# Altium PCB PCB1.PcbDoc
Units mm, origin at the board's own origin, x right, y up, seen from the top; angles counter-clockwise.
Board outline 90.12 x 93.93 mm, 2 copper layers (Top Layer, Bottom Layer), stack 1.536 mm thick; 20 components, 12 nets, 103 pads, 481 vias.
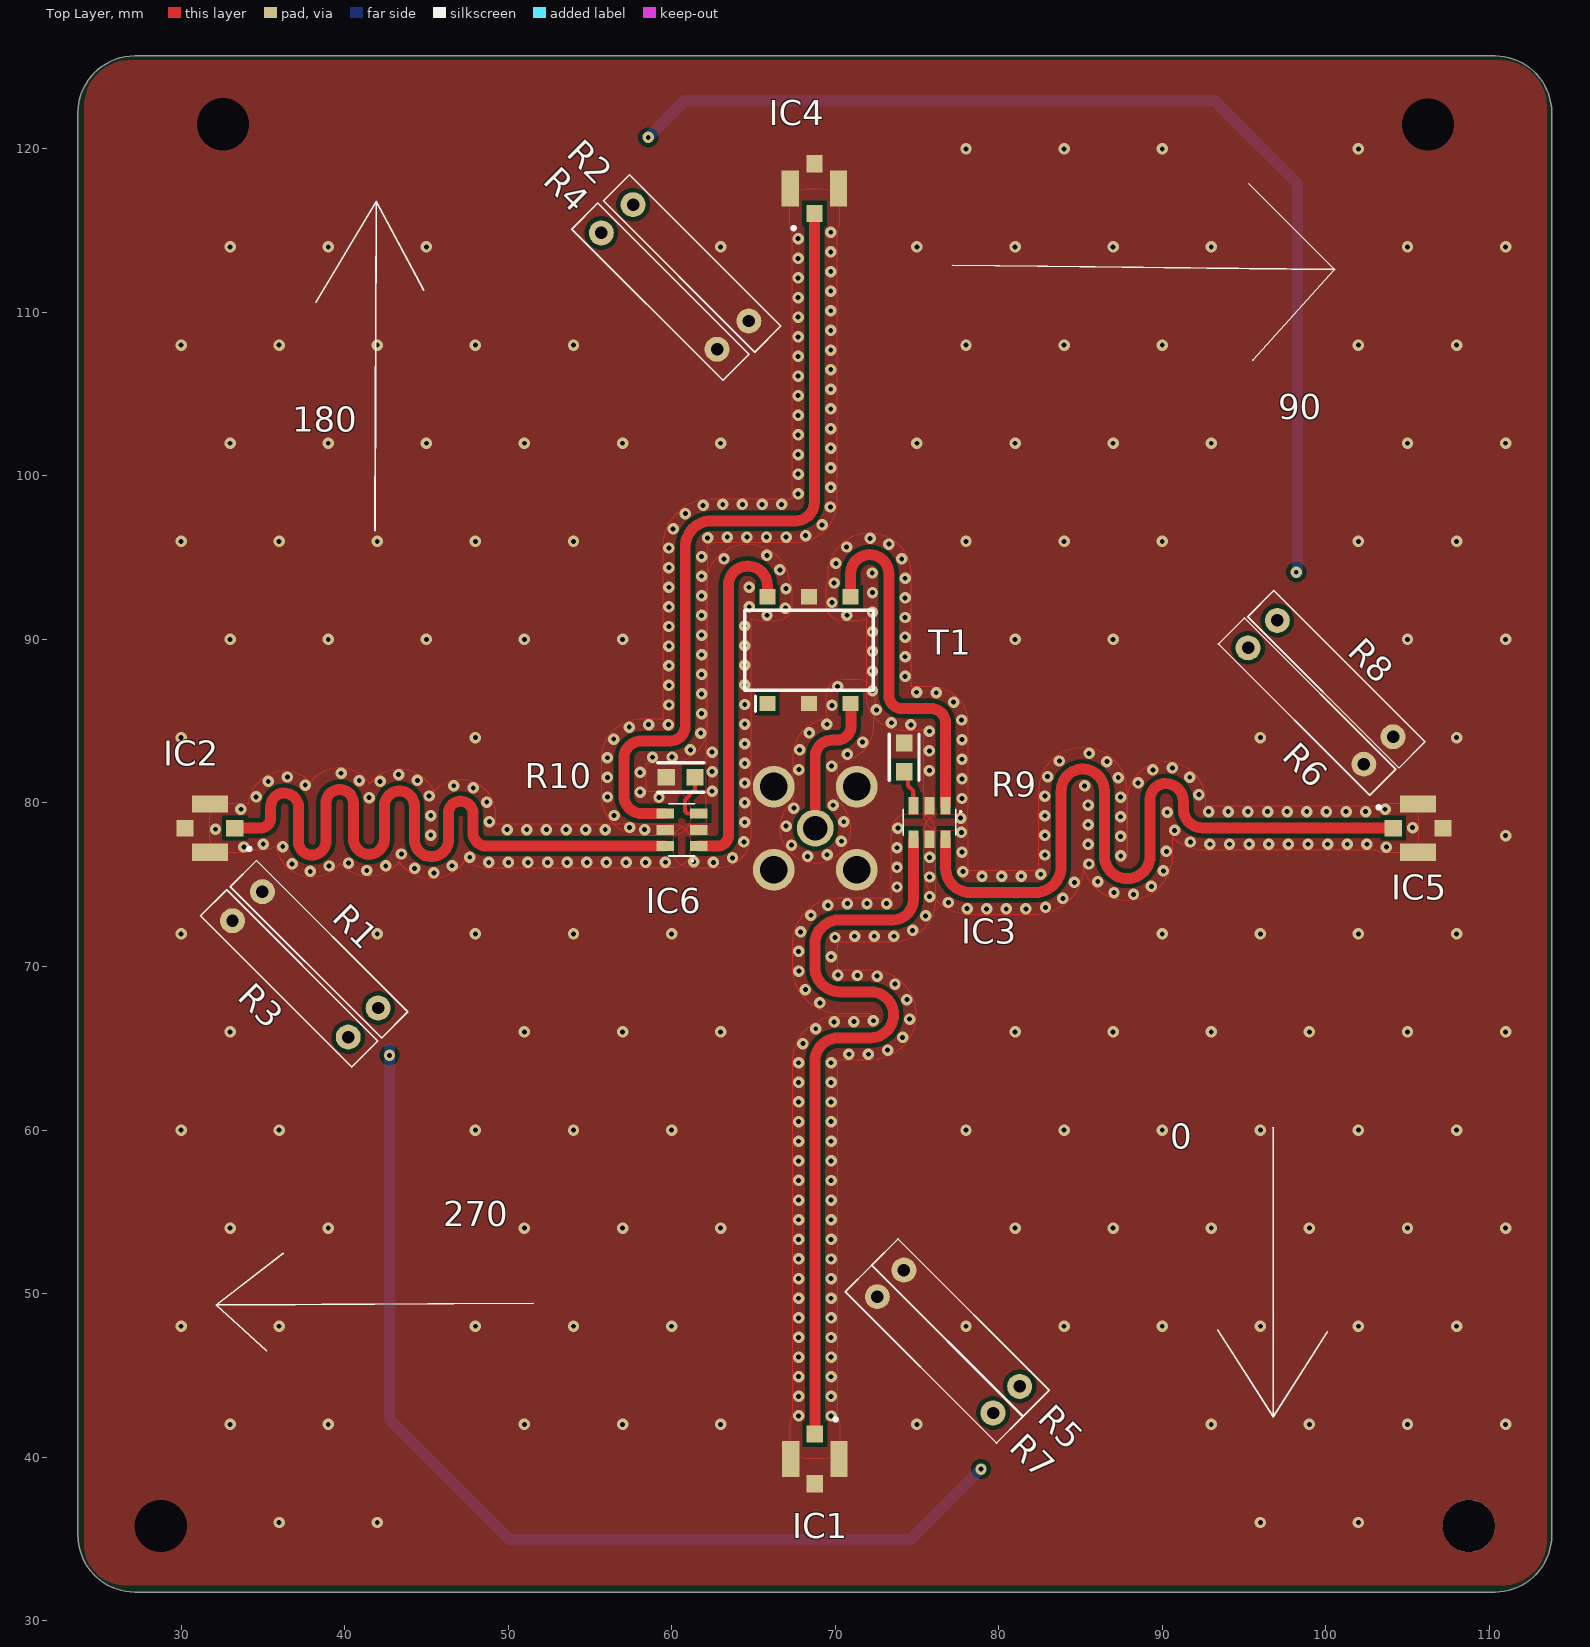
[diagram p0: Top Layer view]
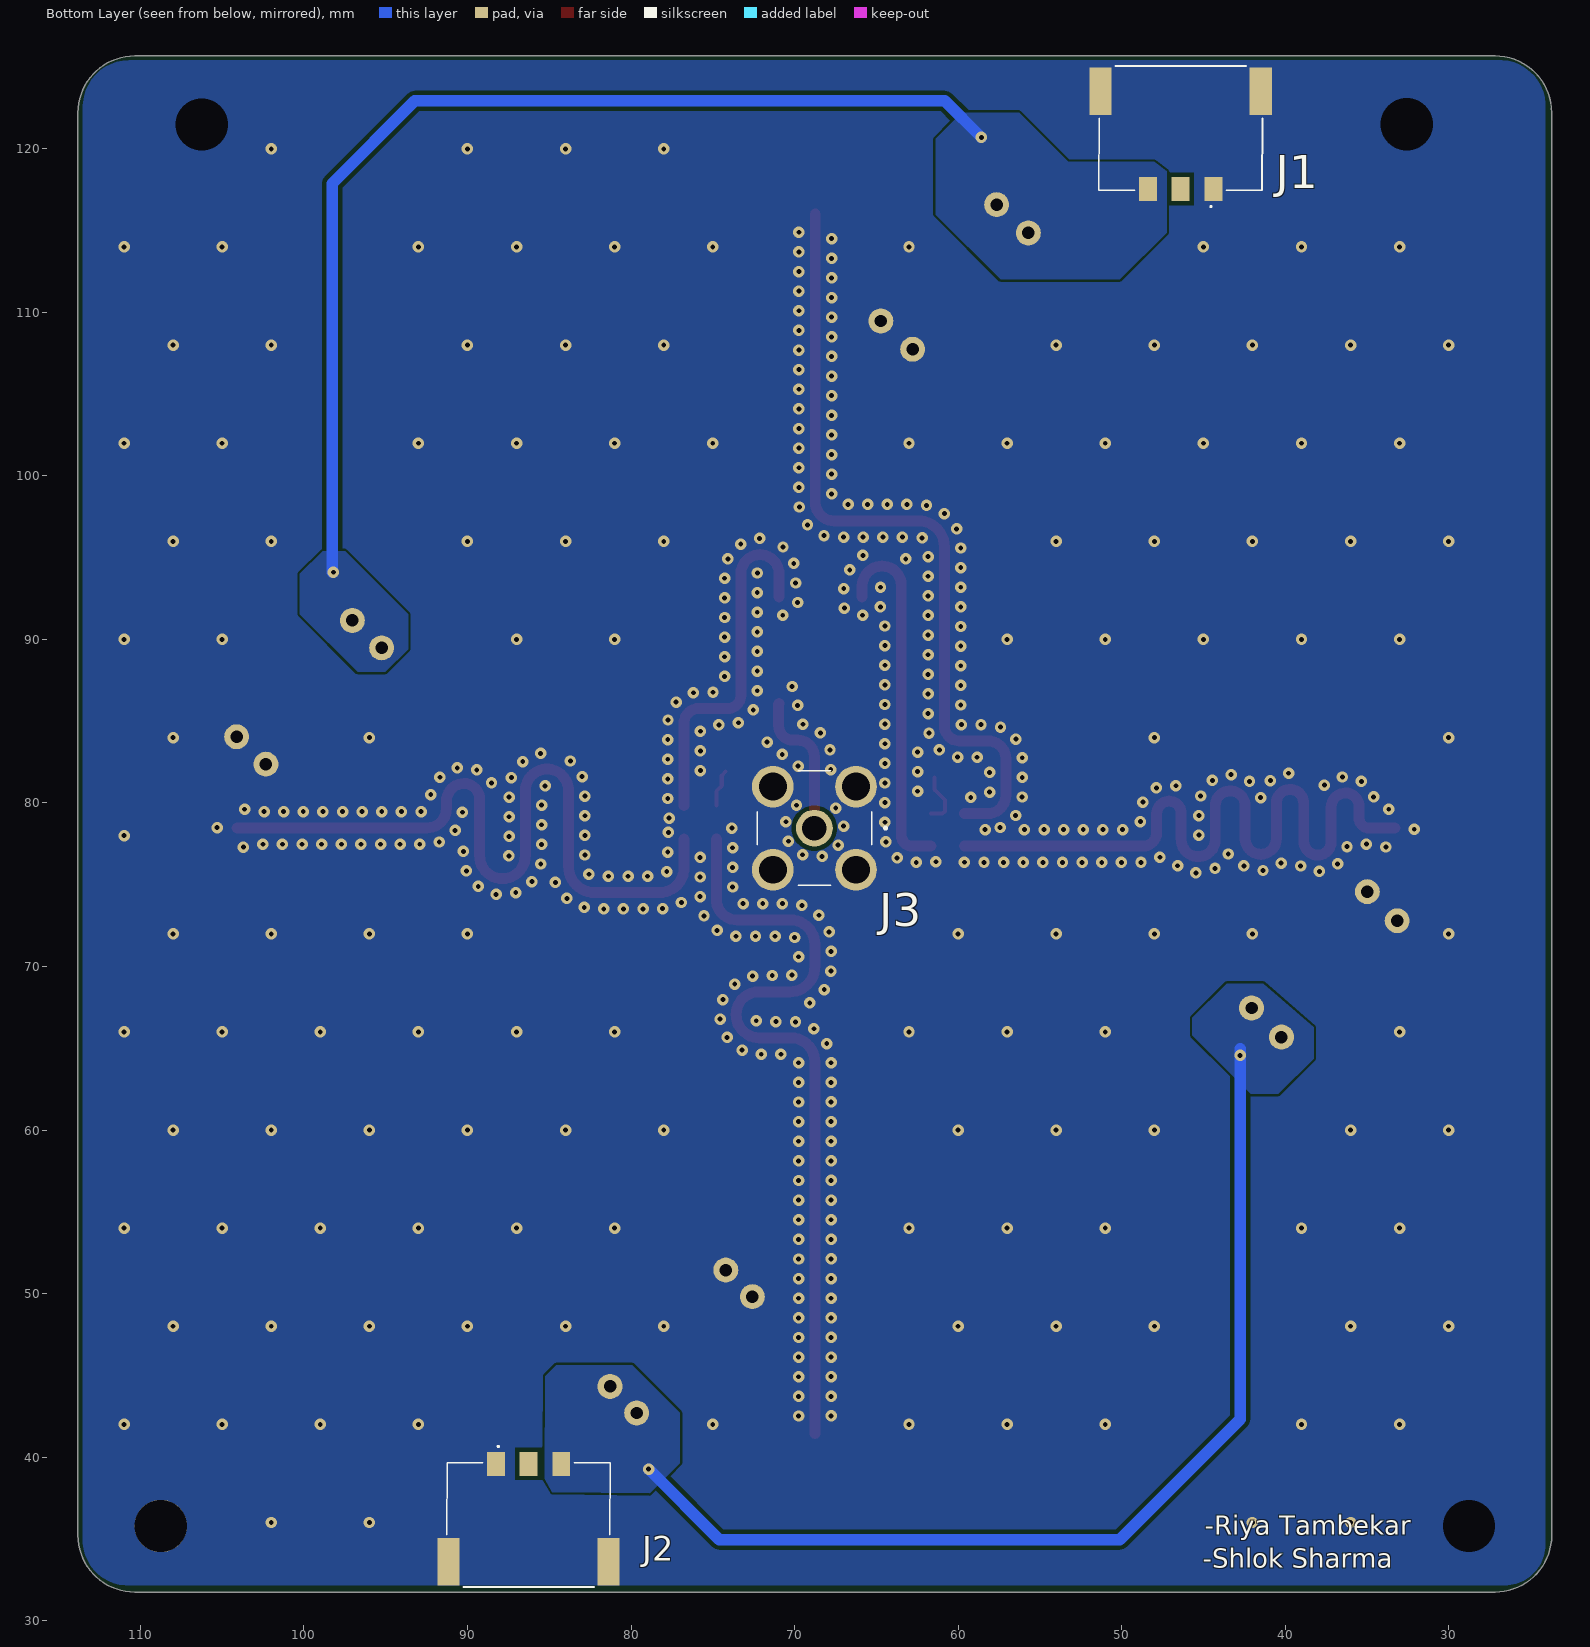
[diagram p1: Bottom Layer view, seen from below]
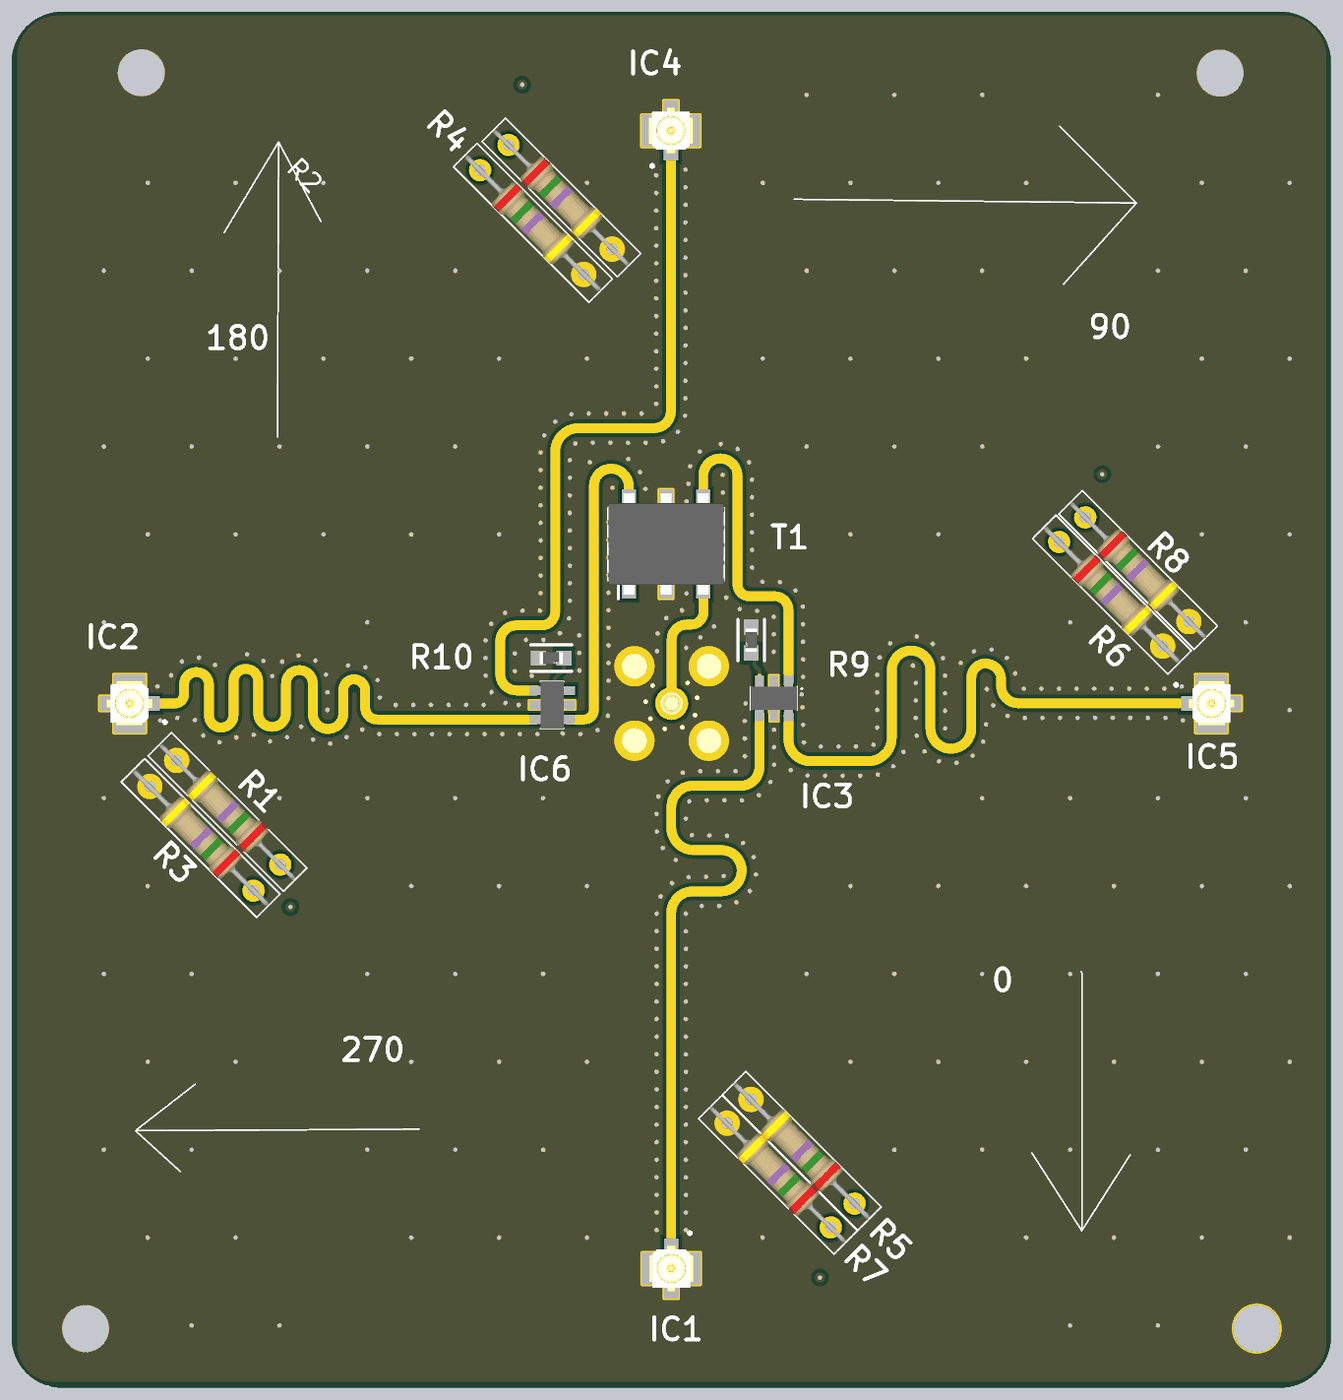
[diagram p2: 3D render of the assembled board from above, using the file's embedded part models]
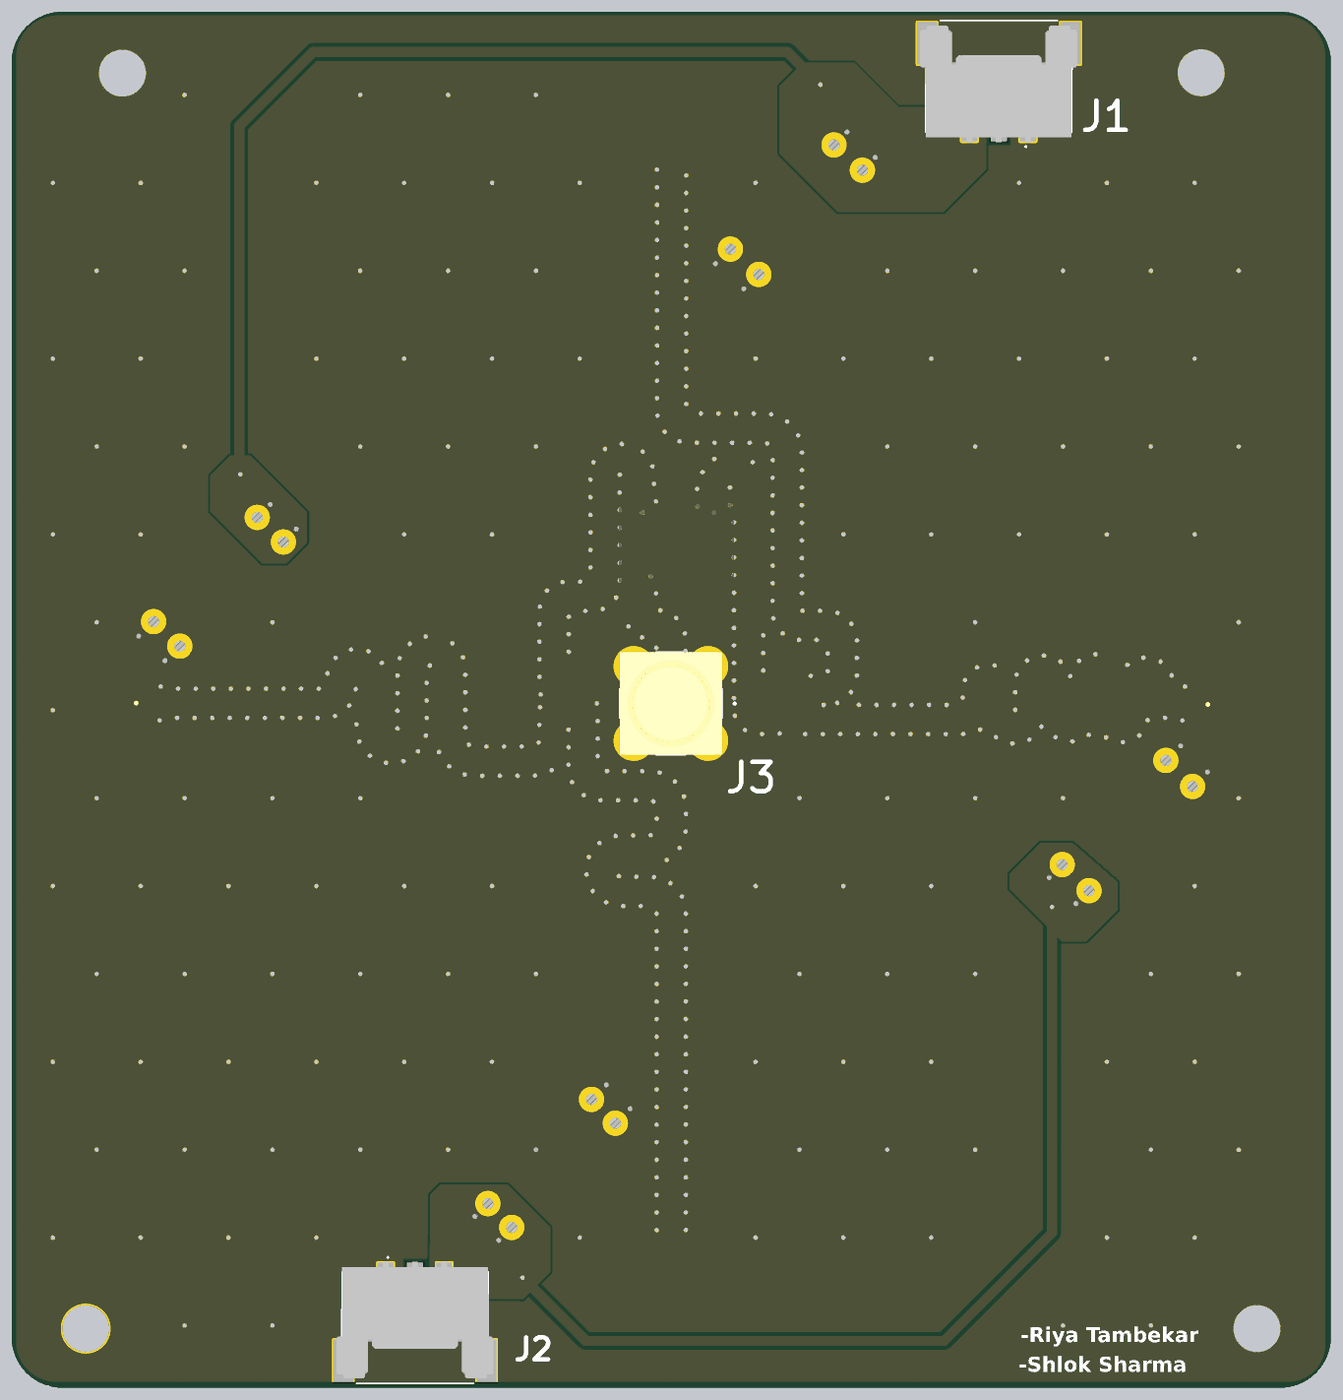
[diagram p3: 3D render of the assembled board from below, using the file's embedded part models]

## Layer stack, top to bottom
Top Solder: solder mask 0.0195, Solder Resist, Dk 3.5
Top Layer: signal copper 0.018
Dielectric 1: dielectric 1.5, FR-4, Dk 4.5
Bottom Layer: signal copper 0.018
Bottom Solder: solder mask 0.0195, Solder Resist, Dk 3.5

## Board outline
27.167,31.75 cw(c27.167,35.219) 23.698,35.219 23.698,122.21 cw(c27.167,122.21) 27.167,125.679 110.349,125.679 cw(c110.349,122.211) 113.817,122.211 113.817,35.219 cw(c110.349,35.219) 110.349,31.75

## Design rules (kind name [scope] priority, off if disabled: settings)
BoardOutlineClearance [All] p1: gap=0.254 ignorepadtopadclearanceinfootprint=FALSE except(-1: Poly-OutlineEdge; 0: Arc-SplitContinuation Track-SplitContinuation SMDPad-SplitContinuation THPad-SplitContinuation Via-SplitContinuation Fill-SplitContinuation Poly-SplitContinuation Region-SplitContinuation Text-SplitContinuation)
Clearance [All] p1: gap=0.254 ignorepadtopadclearanceinfootprint=FALSE except(0.127: Arc-Via Track-Via SMDPad-Via THPad-Via Via-Via Fill-Fill Fill-Poly Fill-Region Poly-Poly Poly-Region Region-Region)
MatchedLengths [InNetClass('All Nets')] p1: tolerance=0.254 checknetsindiffpair=FALSE checkdiffpairvsdiffpair=TRUE checkxsignals=TRUE checkothers=TRUE
PolygonConnect [All] p1: connectstyle=Direct reliefconductorwidth=0.254 reliefentries=4 polygonreliefangle="90 Angle" airgapwidth=0.254
RoutingVias [All] p1: holewidth=0.3 width=0.7 viastyle="Through Hole" minholewidth=0.2 minwidth=0.5 maxholewidth=0.711 maxwidth=1.27
SolderMaskExpansion [All] p1: expansion=0.102 istentingtop=FALSE
SupplyNets "Schematic Supply Nets_3" [InNet('5vb')] p1: voltage=0.000
SupplyNets "Schematic Supply Nets_2" [InNet('5va')] p2: voltage=0.000
SupplyNets "Schematic Supply Nets" [InNet('GND')] p3: voltage=0.000
Width [All] p1: maxlimit=1 minlimit=0.127 preferedwidth=0.7 toplayer_minwidth=0.254 toplayer_prefwidth=0.678 minimp=50.000000 maximp=50.000000 favimp=50.000000
30 further rules are at their usual default settings.

## Components (designator, comment, footprint, x,y, rotation, side; value= is the part's Value field where it differs from the comment)
IC1 "CONMHF1-SMD-G-T" CONMHF1SMDGT 68.758,39.891 r0 top
IC2 "CONMHF1-SMD-G-T" CONMHF1SMDGT 31.762,78.461 r270 top
IC3 "QCN-5D+" QCN5D 75.768,78.816 r180 top
IC4 "CONMHF1-SMD-G-T" CONMHF1SMDGT 68.732,117.565 r180 top
IC5 "CONMHF1-SMD-G-T" CONMHF1SMDGT 105.652,78.461 r90 top
IC6 "QCN-5D+" QCN5D 60.621,78.359 r90 top
J1 "205338-0003" 2053380003 42.388,117.47 r180 bottom
J2 "205338-0003" 2053380003 90.266,39.654 r0 bottom
J3 "901-144-8RFX" 9011448RFX 68.783,78.461 r180 bottom locked
R1 "Resistor Through Hole" "ResistoR THROUGHHOLE" 55.972,69.563 r135 top
R2 "Resistor Through Hole" "ResistoR THROUGHHOLE" 43.723,114.485 r315 top
R3 "Resistor Through Hole" "ResistoR THROUGHHOLE" 54.143,67.785 r135 top
R4 "Resistor Through Hole" "ResistoR THROUGHHOLE" 41.783,112.757 r315 top
R5 "Resistor Through Hole" "ResistoR THROUGHHOLE" 95.199,46.424 r135 top
R6 "Resistor Through Hole" "ResistoR THROUGHHOLE" 81.331,87.383 r315 top
R7 "Resistor Through Hole" "ResistoR THROUGHHOLE" 93.574,44.799 r135 top
R8 "Resistor Through Hole" "ResistoR THROUGHHOLE" 83.119,89.06 r315 top
R9 "AC0603FR-1068KL" FP-AC0603-IPC_A 74.219,82.792 r270 top
R10 "AC0603FR-1068KL" FP-AC0603-IPC_A 60.555,81.561 r0 top
T1 "ADT2-1T-1P" SOTFL254P691X284-6N 68.402,89.343 r90 top

## Footprints (in the part's own frame and the unit in brackets; to place one, negate y for a bottom-side part, rotate by r counter-clockwise, add the part's x,y. Pads: shape width x height; smd on the part's side, far side on the other; paste and mask are expansions set on the pad)
9011448RFX [mm]
  round 2.25 hole 1.5: 1(0,0)
  round 2.55 hole 1.7: 2(-2.54,-2.54) 3(2.54,-2.54) 4(2.54,2.54) 5(-2.54,2.54)
  silkscreen extent -3.5,-3.5 4.4,3.5, body extent -3.5,-3.5 3.5,3.5, height 9.55
2053380003 [mm]
  rect 1.1x1.45 smd: 1(-2,0.075) 2(-4,0.075) 3(-6,0.075)
  rect 1.35x2.9 smd: MP1(0.895,6.05) MP2(-8.895,6.05)
  silkscreen extent -9,-1.05 1,7.6, body extent -9.38,-0.7 1.38,7.25, height 2.6
CONMHF1SMDGT [mm]
  rect 1x1.05 smd: 1(0,1.525) 3(0,-1.525)
  rect 1.05x2.2 smd: 2(-1.475,0) 4(1.475,0)
  silkscreen extent 1.17,2.31 1.37,2.51, body extent -1.5,-1.55 1.5,1.55, height 1.31
FP-AC0603-IPC_A [mm]
  rect 1.059x1.012 smd paste+0 mask+0: 1(-0.877,0) 2(0.877,0)
  silkscreen extent -1.41,-0.91 1.41,0.91, body extent -1.91,-1.01 1.91,1.01, height 0.25
QCN5D [mm]
  rect 0.61x1.07 smd: 1(-0.99,-1.025) 2(0,-1.025) 3(0.99,-1.025) 4(0.99,1.025) 5(0,1.025) 6(-0.99,1.025)
  silkscreen extent -1.95,-0.8 1.6,0.8, body extent -1.6,-0.8 1.6,0.8, height 1.17
"ResistoR THROUGHHOLE" [mil]
  round 60 hole 30: 1(329,446) 2(724,445)
  silkscreen extent 272,402 787,491, body extent 273,401 787,491, height 99
SOTFL254P691X284-6N [mm]
  rect 0.935x0.96 smd: 1(-3.262,2.54) 2(-3.262,0) 3(-3.262,-2.54) 4(3.262,-2.54) 5(3.262,0) 6(3.262,2.54)
  silkscreen extent -3.73,-3.94 2.45,3.94, body extent -3.45,-3.94 3.46,3.94, height 2.84

## Part data
IC1 IC2 IC4 IC5: "Integrated Circuit", Manufacturer_Name="TE Connectivity", Mouser Part Number=712-CONMHF1-SMD-G-T, Arrow Part Number=CONMHF1-SMD-G-T, Arrow Price/Stock=https://www.arrow.com/en/products/conmhf1-smd-g-t/te-connectivity?utm_currency=USD&region=europe, Datasheet Link=https://www.te.com/commerce/DocumentDelivery/DDEController?Action=srchrtrv&DocNm=conmhf1-smd-g-t-ds&DocType=Data%20Sheet&DocLang=English&PartCntxt=CONMHF1-SMD-G-T&DocFormat=pdf, Height=1.31mm, Manufacturer_Part_Number=CONMHF1-SMD-G-T, Mouser Price/Stock=https://www.mouser.co.uk/ProductDetail/TE-Connectivity-Linx-Technologies/CONMHF1-SMD-G-T?qs=7D1LtPJG0i0JqNJVGTgWfg%3D%3D
IC3 IC6: "Integrated Circuit", Manufacturer_Name=Mini-Circuits, Mouser Part Number=139-QCN-5D, Datasheet Link=https://www.mouser.in/datasheet/2/1030/QCN-5D_2b-1701289.pdf, Height=1.068mm, Manufacturer_Part_Number=QCN-5D+, Mouser Price/Stock=https://www.mouser.co.uk/ProductDetail/Mini-Circuits/QCN-5D%2b?qs=xZ%2FP%252Ba9zWqai7gDmnIyxcA%3D%3D
J1 J2: "Connector", Manufacturer_Name=Molex, Mouser Part Number=538-205338-0003, Datasheet Link=https://www.molex.com/pdm_docs/sd/2053380003_sd.pdf, Height=2.8mm, Manufacturer_Part_Number=205338-0003, Mouser Price/Stock=https://www.mouser.co.uk/ProductDetail/Molex/205338-0003?qs=GedFDFLaBXFo3ZC3WBiKdg%3D%3D
J3: "Connector", Manufacturer_Name=Amphenol, Mouser Part Number=523-901-144-8RFX, Arrow Part Number=901-144-8RFX, Arrow Price/Stock=https://www.arrow.com/en/products/901-144-8rfx/amphenol-rf?region=europe, Datasheet Link=https://componentsearchengine.com/Datasheets/1/901-144-8RFX.pdf, Height=9.53mm, Manufacturer_Part_Number=901-144-8RFX, Mouser Price/Stock=https://www.mouser.co.uk/ProductDetail/Amphenol-RF/901-144-8RFX?qs=jpOL8GWAqat%252BbPjbt8toTg%3D%3D
R1 R2 R3 R4 R5 R6 R7 R8: library part Resistor
R9 R10: library part CMP-03412-003773-2, "RES 68KΩ 1.00% 0.1W 0603", RoHS Compliant=Yes
T1: "Transformer", Manufacturer_Name=Mini-Circuits, Datasheet Link=https://www.minicircuits.com/pdfs/ADT2-1T-1P.pdf, Height=2.84mm, Manufacturer_Part_Number=ADT2-1T-1P

## Free pads (board coordinates)
  round 0.075 on Mech2: 1(23.698,35.219) 1(23.698,35.219) 1(23.698,122.21) 1(23.698,122.21) 1(27.167,31.75) 1(27.167,31.75) 1(27.167,125.679) 1(27.167,125.679) 1(36.068,31.75) 1(36.068,31.75) 1(110.349,31.75) 1(110.349,31.75) 1(110.349,125.679) 1(110.349,125.679) 1(113.817,35.219) 1(113.817,35.219) 1(113.817,122.211) 1(113.817,122.211)
  round 0.006 on Mech2: 1(27.163,35.789) 1(30.343,35.789) 1(30.973,121.488) 1(34.153,121.488) 1(104.658,121.488) 1(107.163,35.789) 1(107.838,121.488) 1(110.343,35.789)
  round 3.18 on Mech2: 1(28.753,35.789) 1(32.563,121.488) 1(106.248,121.488) 1(108.753,35.789)
  round 0 hole 3.2: 2(28.753,35.789) 2(106.248,121.488)
  oval 0x1.524 hole 3.2: 2(32.563,121.514)
  round 3.2 hole 3.2: 2(108.753,35.789)

## Via types
v1: diameter 0.7, hole 0.3, Top Layer to Bottom Layer, tented both sides, 481 vias

## Nets (pads, with @x,y where several pads share a name; then routed paths per layer and width w, separated by ;. In a path a pad name is that pad's centre, name@x,y a point inside that pad or via, vN(x,y) a via of type N, cw(c..) or ccw(c..) an arc to the next point about the centre after c; other vN are vias at no path point)
0deg: IC1.1 IC3.4 | length 48.3
  Top Layer w0.67: IC1.1@68.758,41.429 68.758,64.182 cw(c70.21,64.182) 70.21,65.634 72.148,65.634 ccw(c72.148,67.058) 73.572,67.058 ccw(c72.177,67.058) 72.177,68.453 70.29,68.453 cw(c70.29,69.985) 68.758,69.985 68.758,71.359 cw(c70.246,71.359) 70.246,72.847 73.527,72.847 ccw(c73.527,74.099) 74.778,74.099 IC3.4
5va: J2.3 R1.1 R3.1 R5.1 R7.1 | length 63.7
  Bottom Layer w0.7: 42.748,64.973 v1(42.748,64.567) 42.748,42.316 50.114,34.95 74.6,34.95 v1(78.918,39.268) v1@78.918,39.243
5vb: J1.3 R2.1 R4.1 R6.1 R8.1 | length 66.5
  Bottom Layer w0.7: v1(58.572,120.701) 60.808,122.936 93.218,122.936 98.273,117.881 v1@98.273,94.107
  other v1: 98.196,94.107
50_RES_1: IC3.3 R9.2 | length 2.3
  Top Layer w0.254: R9.2 74.447,81.686 74.447,81.051 74.778,80.721 IC3.3
50_RES_2: IC6.3 R10.2 | length 3.2
  Top Layer w0.254: R10.2 61.432,80.812 60.808,80.188 60.808,79.498 60.957,79.349 IC6.3
90deg: IC3.6 IC5.1 | length 48.5
  Top Layer w0.67: IC3.6 76.758,76.024 ccw(c78.257,76.024) 78.257,74.525 82.22,74.525 ccw(c82.22,76.125) 83.82,76.125 83.82,80.695 ; 83.82,80.695 83.82,80.705 ; 83.82,80.695 83.82,80.705 ; 83.82,80.705 cw(c85.14,80.751) 86.462,80.738 ; 86.462,80.734 86.462,80.735 ; 86.462,80.734 86.462,80.735 ; 86.462,80.734 86.462,76.768 ccw(c87.859,76.768) 89.256,76.77 89.256,80.235 cw(c90.211,80.235) 90.211,81.19 cw(c90.211,80.113) 91.288,80.113 91.288,79.655 ccw(c92.469,79.655) 92.469,78.474 IC5.1@103.937,78.474 ; 86.462,80.735 cw(c87.132,80.734) 86.462,80.738 ; 86.462,80.735 cw(c87.132,80.734) 86.462,80.738 ; IC5.1@103.937,78.474 104.089,78.461 IC5.1@103.937,78.474
180deg: IC4.1 IC6.4 | length 48.3
  Top Layer w0.67: IC6.4 58.192,79.349 cw(c58.192,80.467) 57.074,80.467 57.074,82.702 cw(c58.166,82.702) 58.166,83.795 59.919,83.795 ccw(c59.919,84.709) 60.833,84.709 60.833,95.656 cw(c62.433,95.656) 62.433,97.257 67.589,97.257 ccw(c67.589,98.4) 68.732,98.4 IC4.1@68.732,116.026
270deg: IC2.1 IC6.6 | length 48.4
  Top Layer w0.67: IC2.1 34.849,78.461 ccw(c34.849,79.096) 35.484,79.096 35.484,79.781 cw(c36.309,79.781) 36.309,80.607 cw(c36.309,79.731) 37.186,79.731 37.186,77.622 ccw(c37.998,77.622) 37.998,76.81 ccw(c37.998,77.673) 38.862,77.673 38.862,79.918 ; IC6.6 48.666,77.369 cw(c48.666,78.181) 47.854,78.181 47.854,79.35 ccw(c47.092,79.35) 47.092,80.112 ccw(c47.092,79.375) 46.355,79.375 46.355,77.8 ; 38.862,79.918 ccw(c38.192,79.918) 38.861,79.946 ; 38.862,79.918 ccw(c38.192,79.918) 38.861,79.946 ; 38.861,79.946 cw(c39.699,79.984) 40.538,79.984 40.538,77.817 ccw(c41.491,77.814) 42.443,77.771 ; 42.443,77.771 ccw(c41.773,77.8) 42.443,77.8 ; 42.443,77.771 ccw(c41.773,77.8) 42.443,77.8 ; 42.443,77.8 42.443,79.782 ; 42.443,79.782 ccw(c41.773,79.782) 42.443,79.797 ; 42.443,79.782 ccw(c41.773,79.782) 42.443,79.797 ; 42.443,79.797 cw(c43.358,79.825) 44.272,79.823 ; 44.272,79.821 44.272,79.823 ; 44.272,79.821 44.272,77.76 ccw(c45.314,77.757) 46.355,77.786 ; 44.272,79.821 44.272,79.823 ; 46.355,77.786 cw(c47.025,77.8) 46.355,77.797 ; 46.355,77.786 cw(c47.025,77.8) 46.355,77.797 ; 46.355,77.797 46.355,77.8 ; 46.355,77.797 46.355,77.8
GND: IC1.2 IC1.3 IC1.4 IC2.2 IC2.3 IC2.4 IC3.2 IC3.5 IC4.2 IC4.3 IC4.4 IC5.2 IC5.3 IC5.4 IC6.2 IC6.5 J1.1 J1.MP1 J1.MP2 J2.1 J2.MP1 J2.MP2 J3.2 J3.3 J3.4 J3.5 pad.2 R1.2 R2.2 R3.2 R4.2 R5.2 R6.2 R7.2 R8.2 R9.1 R10.1 T1.2 T1.5
  other v1: 36,36 42,36 96,36 102,36 33,42 39,42 51,42 57,42 63,42 75,42 93,42 99,42 105,42 111,42 67.761,42.517 69.755,42.513 67.761,43.717 69.755,43.713 67.761,44.917 69.755,44.913 69.755,46.113 67.761,46.117 67.761,47.317 69.755,47.313 30,48 36,48 48,48 54,48 60,48 78,48 84,48 90,48 96,48 102,48 108,48 67.761,48.517 69.755,48.513 67.761,49.717 69.755,49.713 69.755,50.913 67.761,50.917 67.761,52.117 69.755,52.113 67.761,53.317 69.755,53.313 33,54 39,54 51,54 57,54 63,54 81,54 87,54 93,54 99,54 105,54 111,54 67.761,54.517 69.755,54.513 69.755,55.713 67.761,55.717 67.761,56.917 69.755,56.913 67.761,58.117 69.755,58.113 67.761,59.317 69.755,59.313 30,60 36,60 48,60 54,60 60,60 78,60 84,60 90,60 96,60 102,60 108,60 69.755,60.513 67.761,60.517 67.761,61.717 69.755,61.713 67.761,62.917 69.755,62.913 67.761,64.117 69.755,64.113 70.835,64.636 72.035,64.636 73.209,64.887 68.03,65.286 74.125,65.661 33,66 51,66 57,66 63,66 81,66 87,66 93,66 99,66 105,66 111,66 68.816,66.193 69.941,66.61 71.141,66.631 72.34,66.682 74.548,66.784 69.067,67.778 74.384,67.973 68.183,68.59 73.658,68.929 72.562,69.417 71.362,69.45 70.162,69.469 67.781,69.721 69.755,70.597 67.761,70.921 69.99,71.774 71.188,71.85 72.388,71.85 73.588,71.852 30,72 42,72 48,72 54,72 60,72 90,72 96,72 102,72 108,72 67.885,72.114 74.735,72.204 75.535,73.099 68.512,73.137 78.064,73.541 79.264,73.528 80.464,73.528 81.664,73.528 82.861,73.612 69.55,73.738 70.746,73.844 71.946,73.844 73.146,73.844 76.924,73.914 83.923,74.171 75.775,74.275 88.245,74.407 87.05,74.518 73.781,74.862 89.341,74.895 84.623,75.146 86.06,75.196 75.775,75.475 78.981,75.522 80.181,75.522 81.381,75.522 82.574,75.645 45.457,75.726 77.813,75.8 37.901,75.816 90.067,75.851 41.354,75.872 44.288,75.996 73.781,76.062 39.055,76.147 42.519,76.158 46.575,76.163 36.792,76.275 85.519,76.268 40.242,76.323 48.814,76.372 50.014,76.372 51.214,76.372 52.414,76.372 53.614,76.372 54.814,76.372 56.014,76.372 57.214,76.372 58.414,76.372 59.614,76.374 62.555,76.372 61.355,76.408 63.723,76.645 47.656,76.684 75.775,76.675 68.314,76.739 87.462,76.76 82.823,76.819 69.51,76.834 43.477,76.881 77.755,76.999 90.253,77.036 73.781,77.262 33.84,77.309 36.218,77.328 103.703,77.305 67.331,77.428 35.028,77.48 85.464,77.466 92.915,77.477 94.115,77.477 95.315,77.477 96.515,77.477 97.715,77.477 98.915,77.477 100.115,77.477 101.315,77.477 102.515,77.477 64.418,77.624 91.723,77.612 70.38,77.662 87.459,77.96 111,78 45.269,78.03 82.823,78.019 77.719,78.198 90.754,78.321 49.943,78.366 51.143,78.366 52.343,78.366 53.543,78.366 54.743,78.366 55.943,78.366 58.343,78.366 32.106,78.396 73.835,78.461 105.308,78.489 57.429,78.501 67.003,78.582 85.464,78.666 64.472,78.822 70.526,78.853 48.851,78.864 77.672,79.078 87.459,79.16 45.269,79.23 56.48,79.235 82.823,79.219 90.308,79.435 92.84,79.472 94.04,79.472 95.24,79.472 96.44,79.472 97.64,79.472 98.84,79.472 100.04,79.472 101.24,79.472 102.44,79.472 33.662,79.616 103.631,79.616 67.481,79.682 69.88,79.864 85.464,79.866 64.472,80.022 48.697,80.054 77.755,80.275 41.499,80.331 59.227,80.346 34.59,80.377 56.078,80.366 87.459,80.36 45.171,80.426 82.823,80.419 92.243,80.513 58.071,80.668 62.477,80.715 47.871,80.924 46.678,81.056 85.254,81.048 37.595,81.092 64.472,81.222 88.531,81.227 35.332,81.32 42.178,81.321 40.898,81.37 44.452,81.386 77.755,81.475 56.077,81.566 87.313,81.552 36.502,81.588 91.683,81.574 82.989,81.607 43.304,81.735 39.785,81.818 58.071,81.868 62.477,81.915 75.761,81.984 89.433,82.018 67.786,82.043 90.626,82.143 69.78,82.26 64.472,82.422 86.617,82.529 83.709,82.567 77.755,82.675 56.076,82.766 58.831,82.797 60.031,82.802 70.748,82.969 85.529,83.035 62.477,83.115 75.761,83.184 61.145,83.248 67.83,83.242 64.472,83.622 71.681,83.723 77.755,83.875 56.461,83.902 30,84 48,84 96,84 108,84 61.778,84.268 68.414,84.29 75.761,84.384 57.406,84.642 58.597,84.792 59.797,84.792 74.628,84.779 64.472,84.822 69.494,84.813 73.435,84.909 77.737,85.075 61.83,85.467 72.524,85.689 59.836,85.991 69.807,85.972 64.472,86.022 77.24,86.167 61.83,86.667 76.184,86.738 74.985,86.773 72.282,86.865 70.149,87.122 59.836,87.191 64.472,87.222 74.276,87.741 61.83,87.867 72.282,88.065 59.836,88.391 64.472,88.422 74.276,88.941 61.83,89.067 72.282,89.265 59.836,89.591 64.472,89.622 33,90 39,90 45,90 51,90 57,90 81,90 87,90 105,90 111,90 74.276,90.141 61.83,90.267 72.282,90.465 59.836,90.791 64.472,90.822 74.276,91.341 61.83,91.467 65.832,91.481 70.72,91.481 72.282,91.665 66.952,91.911 59.836,91.991 64.746,91.992 69.807,92.26 74.276,92.541 61.83,92.667 72.282,92.865 66.993,93.111 59.836,93.191 64.742,93.192 69.935,93.453 74.276,93.741 61.83,93.867 72.27,94.065 66.623,94.252 59.836,94.391 70.047,94.648 63.202,94.93 74.074,94.924 61.83,95.067 65.821,95.145 59.836,95.591 70.704,95.652 73.287,95.83 30,96 36,96 42,96 48,96 54,96 78,96 84,96 90,96 102,96 108,96 72.139,96.178 62.203,96.207 63.402,96.259 64.602,96.259 65.802,96.259 67.002,96.259 68.198,96.355 60.088,96.764 69.206,97.006 60.839,97.7 69.704,98.098 61.929,98.202 63.128,98.254 64.328,98.254 65.528,98.254 66.728,98.254 67.735,98.906 69.73,99.298 67.735,100.106 69.73,100.498 67.735,101.306 69.73,101.698 33,102 39,102 45,102 51,102 57,102 63,102 75,102 81,102 87,102 93,102 105,102 111,102 67.735,102.506 69.73,102.898 67.735,103.706 69.73,104.098 67.735,104.906 69.73,105.298 67.735,106.106 69.73,106.498 67.735,107.306 69.73,107.698 30,108 36,108 42,108 48,108 54,108 78,108 84,108 90,108 102,108 108,108 67.735,108.506 69.73,108.898 67.735,109.706 69.73,110.098 67.735,110.906 69.73,111.298 67.735,112.106 69.73,112.498 67.735,113.306 69.73,113.698 33,114 39,114 45,114 63,114 75,114 81,114 87,114 93,114 105,114 111,114 67.735,114.506 69.73,114.898 78,120 84,120 90,120 102,120
NetIC3_1: IC3.1 T1.4 | length 22
  Top Layer w0.67: T1.4 70.942,94.012 cw(c72.113,94.012) 72.113,95.183 cw(c72.113,94.018) 73.279,94.018 73.279,86.589 ccw(c74.092,86.589) 74.092,85.776 75.844,85.776 cw(c75.844,84.862) 76.758,84.862 IC3.1
NetIC6_1: IC6.1 T1.6 | length 21.9
  Top Layer w0.67: IC6.1 62.815,77.369 ccw(c62.815,78.029) 63.475,78.029 63.475,93.32 cw(c64.643,93.32) 64.643,94.488 cw(c64.643,93.269) 65.862,93.269 T1.6
NetJ3_1: J3.1 T1.3 | length 9.1
  Top Layer w0.67: J3.1 68.783,82.829 cw(c69.799,82.829) 69.799,83.845 70.104,83.845 ccw(c70.104,84.709) 70.968,84.709 T1.3@70.968,86.055 ; T1.3@70.968,86.055 ccw(c70.942,86.055) T1.3 cw(c70.942,86.055) T1.3@70.968,86.055
pads on no net: J1.2 J2.2 T1.1

## Polygon pours and split planes (outlines as drawn)
5vb on Bottom Layer "5VB_L02_P002" (solid, remove dead copper, pour order 2): 93.624,91.542 93.624,89.408 95.021,88.011 96.723,88.011 100.254,91.542 100.254,94.005 98.857,95.402 97.485,95.402
GND on Bottom Layer "GND_L02_P015" (solid, pour order 15): 113.563,122.352 ccw(c113.563,122.301) 113.513,122.301 113.513,34.914 cw(c110.755,34.914) 110.755,32.156 26.623,32.156 cw(c26.619,34.696) 24.079,34.696 24.079,122.595 cw(c26.913,122.591) 26.913,125.425 110.529,125.425 cw(c110.643,122.556) 113.513,122.669 113.513,122.403
5va on Bottom Layer "5VA_L02_P003" (solid, remove dead copper, pour order 3): 41.349,68.961 43.561,68.961 45.669,66.853 45.669,65.786 42.088,62.205 40.411,62.205 38.252,64.364 38.252,66.272
5va on Bottom Layer "5VA_L02_P000" (solid, remove dead copper, pour order 0): 85.268,38.684 84.803,37.861 78.85,37.787 77.013,39.624 77.013,42.723 79.918,45.628 84.572,45.628 85.242,44.958
5vb on Bottom Layer "5VB_L02_P001" (solid, remove dead copper, pour order 1): 47.244,118.617 47.244,114.884 50.114,112.014 57.404,112.014 61.366,115.976 61.366,120.625 59.78,122.211 56.272,122.211 53.264,119.202 48.01,119.202
GND on Top Layer (solid, pour order 26): 302 vertices, not listed, extent 31.748,75.364 61.145,82.173
GND on Top Layer (solid, pour order 27): 327 vertices, not listed, extent 75.401,73.167 105.666,83.424
GND on Top Layer "Top Layer-GND" (solid, pour order 25): 275 vertices, not listed, extent 67.244,39.891 76.135,79.34
GND on Top Layer "Top Layer-GND 3" (solid, pour order 20): 166 vertices, not listed, extent 66.643,76.321 72.436,87.562
GND on Top Layer "Top Layer-GND 4" (solid, pour order 19): 166 vertices, not listed, extent 69.448,78.292 78.118,96.539
GND on Top Layer "Top Layer-GND 5" (solid, pour order 18): 64.681,95.839 64.709,95.841 64.722,95.839 64.742,95.839 65.047,95.809 65.144,95.787 65.242,95.771 65.535,95.682 65.625,95.641 65.719,95.606 65.989,95.461 66.069,95.403 66.154,95.351 66.39,95.157 66.458,95.084 66.531,95.016 66.725,94.78 66.778,94.695 66.836,94.614 66.98,94.344 67.015,94.251 67.056,94.161 67.145,93.868 67.161,93.77 67.184,93.673 67.189,93.62 67.22,93.579 67.321,93.334 67.356,93.072 67.356,92.137 67.321,91.875 67.22,91.63 67.059,91.42 66.849,91.259 66.605,91.158 66.342,91.123 65.382,91.123 65.12,91.158 64.875,91.259 64.83,91.294 64.83,78.044 64.832,78.029 64.826,77.985 64.828,77.962 64.823,77.94 64.823,77.896 64.789,77.637 64.721,77.381 64.62,77.139 64.559,77.033 64.488,76.91 64.329,76.702 64.141,76.515 63.934,76.356 63.811,76.285 63.704,76.223 63.462,76.123 63.207,76.055 62.947,76.02 62.904,76.02 62.881,76.016 62.858,76.017 62.815,76.012 62.799,76.014 61.646,76.014 61.547,76.027 61.448,76.033 61.362,76.05 61.111,76.05 60.848,76.085 60.604,76.186 60.394,76.347 60.233,76.557 60.132,76.802 60.097,77.064 60.097,77.674 60.132,77.936 60.233,78.181 60.394,78.391 60.604,78.552 60.848,78.653 61.111,78.688 61.362,78.688 61.448,78.705 61.547,78.711 61.646,78.724 62.119,78.724 62.119,93.314 62.119,93.32 62.123,93.356 62.121,93.386 62.124,93.399 62.123,93.419 62.152,93.714 62.175,93.811 62.191,93.909 62.277,94.192 62.318,94.283 62.353,94.376 62.493,94.637 62.551,94.718 62.603,94.802 62.791,95.031 62.864,95.099 62.932,95.171 63.161,95.359 63.245,95.412 63.326,95.47 63.587,95.609 63.68,95.644 63.771,95.685 64.054,95.771 64.152,95.788 64.249,95.81 64.544,95.839 64.563,95.838 64.577,95.841 64.605,95.839 64.643,95.844
GND on Top Layer "Top Layer-GND 6" (solid, pour order 17): 198 vertices, not listed, extent 55.713,77.988 70.246,117.565
GND on Top Layer "GND_L01_P016" (solid, pour order 16): 113.563,122.352 ccw(c113.563,122.301) 113.513,122.301 113.513,34.914 cw(c110.755,34.914) 110.755,32.156 26.625,32.156 cw(c26.619,34.696) 24.079,34.696 24.079,122.595 cw(c26.913,122.591) 26.913,125.425 110.529,125.425 cw(c110.643,122.556) 113.513,122.669 113.513,122.403

## Silkscreen, mask and mechanical layers (free items; w line width, h text height)
Top Overlay:
  lines w0.1: 35.23,46.507 32.156,49.301 ; 36.246,52.476 32.156,49.301 ; 38.227,110.617 41.935,116.789 ; 41.862,96.647 41.935,116.789 ; 44.831,111.354 41.935,116.789 ; 51.537,49.403 32.156,49.301 ; 77.165,112.878 100.533,112.624 ; 93.396,47.777 96.799,42.469 ; 95.301,117.856 100.533,112.624 ; 95.555,107.086 100.533,112.624 ; 96.749,60.147 cw(c96.749,60.096) 96.799,60.096 96.799,42.469 ; 100.101,47.65 96.799,42.469
  text "90" at 97.104,103.454 h1.52
  text "180" at 36.805,102.692 h1.52
  text "0" at 90.5,58.852 h1.52
  text "270" at 46.025,54.102 h1.52
Bottom Overlay:
  text "-Riya Tambekar" at 44.907,34.864 h2
  text "-Shlok Sharma" at 45.034,32.847 h2
Top Solder:
  lines w0.67: 33.287,78.461 34.849,78.461 ccw(c34.849,79.096) 35.484,79.096 35.484,79.781 cw(c36.309,79.781) 36.309,80.607 cw(c36.309,79.731) 37.186,79.731 37.186,77.622 ccw(c37.998,77.622) 37.998,76.81 ccw(c37.998,77.673) 38.862,77.673 38.862,79.918 ; 38.861,79.946 cw(c39.699,79.984) 40.538,79.984 40.538,77.817 ccw(c41.491,77.814) 42.443,77.771 ; 42.443,77.8 42.443,79.782 ; 42.443,79.797 cw(c43.358,79.825) 44.272,79.823 ; 44.272,79.821 44.272,77.76 ccw(c45.314,77.757) 46.355,77.786 ; 46.355,77.8 46.355,79.375 cw(c47.092,79.375) 47.092,80.112 cw(c47.092,79.35) 47.854,79.35 47.854,78.181 ccw(c48.666,78.181) 48.666,77.369 59.596,77.369 ; 59.596,79.349 58.192,79.349 cw(c58.192,80.467) 57.074,80.467 57.074,82.702 cw(c58.166,82.702) 58.166,83.795 59.919,83.795 ccw(c59.919,84.709) 60.833,84.709 60.833,95.656 cw(c62.433,95.656) 62.433,97.257 67.589,97.257 ccw(c67.589,98.4) 68.732,98.4 68.732,116.026 ; 61.646,77.369 62.815,77.369 ccw(c62.815,78.029) 63.475,78.029 63.475,93.32 cw(c64.643,93.32) 64.643,94.488 cw(c64.643,93.269) 65.862,93.269 65.862,92.605 ; 68.758,41.429 68.758,64.182 cw(c70.21,64.182) 70.21,65.634 72.148,65.634 ccw(c72.148,67.058) 73.572,67.058 ccw(c72.177,67.058) 72.177,68.453 70.29,68.453 cw(c70.29,69.985) 68.758,69.985 68.758,71.359 cw(c70.246,71.359) 70.246,72.847 73.527,72.847 ccw(c73.527,74.099) 74.778,74.099 74.778,77.791 ; 68.783,78.461 68.783,82.829 cw(c69.799,82.829) 69.799,83.845 70.104,83.845 ccw(c70.104,84.709) 70.968,84.709 70.968,86.055 ; 70.942,92.605 70.942,94.012 cw(c72.113,94.012) 72.113,95.183 cw(c72.113,94.018) 73.279,94.018 73.279,86.589 ccw(c74.092,86.589) 74.092,85.776 75.844,85.776 cw(c75.844,84.862) 76.758,84.862 76.758,79.841 ; 76.758,77.791 76.758,76.024 ccw(c78.257,76.024) 78.257,74.525 82.22,74.525 ccw(c82.22,76.125) 83.82,76.125 83.82,80.695 ; 83.82,80.705 cw(c85.14,80.751) 86.462,80.738 ; 86.462,80.734 86.462,76.768 ccw(c87.859,76.768) 89.256,76.77 89.256,80.235 cw(c90.211,80.235) 90.211,81.19 cw(c90.211,80.113) 91.288,80.113 91.288,79.655 ccw(c92.469,79.655) 92.469,78.474 103.937,78.474
Mechanical 1:
  lines w0.254: 56.353,116.818 65.704,116.818 65.729,116.793 65.729,107.422 65.531,107.62 56.363,107.62 56.363,116.818 ; 93.198,81.414 93.198,90.785 93.218,90.805 104.641,90.805 104.651,90.815 104.651,81.436 104.623,81.407 93.218,81.407 ; 32.811,66.046 32.811,68.624 32.811,71.576 32.811,72.192 32.817,72.186 32.817,72.923 32.817,75.381 32.856,75.362 34.865,75.362 36.512,75.362 38.925,75.362 42.215,75.362 42.215,74.27 42.215,66.929 42.215,66.015 39.224,66.015 36.9,66.015 32.842,66.015 32.811,66.046 ; 71.627,43.06 71.647,43.08 71.647,52.349 81.001,52.349 81.001,43.053 80.994,43.06 71.627,43.06
Top 3D Body:
  lines w0.15: 23.698,35.219 ccw(c27.167,35.219) 27.167,31.75 36.068,31.75 110.349,31.75 ccw(c110.349,35.219) 113.817,35.219 113.817,122.211 ccw(c110.349,122.211) 110.349,125.679 27.167,125.679 ccw(c27.167,122.21) 23.698,122.21 23.698,35.219
Top Courtyard:
  circle w0.013: c108.753,35.789 r1.6
  circle w0.013: c106.248,121.488 r1.6
  circle w0.013: c32.563,121.488 r1.6
  circle w0.013: c28.753,35.789 r1.6
Drill Drawing:
  drawing of 443 lines, arcs and shapes, not listed
  text "Symbol" at 21.131,174.346 h1.83
  text "Count" at 33.98,174.346 h1.83
  text "Hole Size" at 49.216,174.346 h1.83
  text "Plated" at 78.418,174.346 h1.83
  text "Hole Type" at 91.267,174.346 h1.83
  text "Drill Layer Pair" at 109.906,174.346 h1.83
  text "Via/Pad" at 147.994,174.346 h1.83
  text "Pad Shape" at 162.976,174.346 h1.83
  text "Template" at 181.92,174.346 h1.83
  text "Description" at 200.964,174.346 h1.83
  text "Hole Tolerance (+)" at 222.65,174.346 h1.83
  text "Hole Tolerance (-)" at 256.524,174.346 h1.83
  text "1" at 33.98,170.536 h1.52
  text "59.06mil (1.500mm)" at 49.216,170.536 h1.52
  text "PTH" at 78.418,170.536 h1.52
  text "Round" at 91.267,170.536 h1.52
  text "Top Layer - Bottom Layer" at 109.906,170.536 h1.52
  text "Pad" at 147.994,170.536 h1.52
  text "Rounded" at 162.976,170.536 h1.52
  text "c225h150" at 181.92,170.536 h1.52
  text "4" at 33.98,166.726 h1.52
  text "66.93mil (1.700mm)" at 49.216,166.726 h1.52
  text "PTH" at 78.418,166.726 h1.52
  text "Round" at 91.267,166.726 h1.52
  text "Top Layer - Bottom Layer" at 109.906,166.726 h1.52
  text "Pad" at 147.994,166.726 h1.52
  text "Rounded" at 162.976,166.726 h1.52
  text "c255h170" at 181.92,166.726 h1.52
  text "4" at 33.98,162.916 h1.52
  text "125.98mil (3.200mm)" at 49.216,162.916 h1.52
  text "PTH" at 78.418,162.916 h1.52
  text "Round" at 91.267,162.916 h1.52
  text "Top Layer - Bottom Layer" at 109.906,162.916 h1.52
  text "Pad" at 147.994,162.916 h1.52
  text "Rounded" at 162.976,162.916 h1.52
  text "(Mixed)" at 181.92,162.916 h1.52
  text "16" at 33.98,159.106 h1.52
  text "30.00mil (0.762mm)" at 49.216,159.106 h1.52
  text "PTH" at 78.418,159.106 h1.52
  text "Round" at 91.267,159.106 h1.52
  text "Top Layer - Bottom Layer" at 109.906,159.106 h1.52
  text "Pad" at 147.994,159.106 h1.52
  text "Rounded" at 162.976,159.106 h1.52
  text "c152h76" at 181.92,159.106 h1.52
  text "481" at 33.98,155.296 h1.52
  text "11.81mil (0.300mm)" at 49.216,155.296 h1.52
  text "PTH" at 78.418,155.296 h1.52
  text "Round" at 91.267,155.296 h1.52
  text "Top Layer - Bottom Layer" at 109.906,155.296 h1.52
  text "Via" at 147.994,155.296 h1.52
  text "Rounded" at 162.976,155.296 h1.52
  text "v70h30m0mx0" at 181.92,155.296 h1.52
  text "506 Total" at 33.98,151.486 h1.52
  text "Layer" at 203.971,140.132 h1.52
  text "Name" at 214.382,140.132 h1.52
  text "Material" at 237.998,140.132 h1.52
  text "Thickness" at 259.836,140.132 h1.52
  text "Constant" at 276.342,140.132 h1.52
  text "Board Layer Stack" at 290.816,140.132 h1.52
  text "Top Overlay" at 214.382,137.084 h1.52
  text "Top Solder" at 214.382,134.036 h1.52
  text "Solder Resist" at 237.998,134.036 h1.52
  text "0.77mil" at 259.836,134.036 h1.52
  text "3.5" at 276.342,134.036 h1.52
  text "1" at 203.971,130.988 h1.52
  text "Top Layer" at 214.382,130.988 h1.52
  text "0.71mil" at 259.836,130.988 h1.52
  text "Dielectric 1" at 214.382,127.94 h1.52
  text "FR-4" at 237.998,127.94 h1.52
  text "59.06mil" at 259.836,127.94 h1.52
  text "4.5" at 276.342,127.94 h1.52
  text "2" at 203.971,124.892 h1.52
  text "Bottom Layer" at 214.382,124.892 h1.52
  text "0.71mil" at 259.836,124.892 h1.52
  text "FABRICATION NOTES:" at 119.659,122.657 h1.52
  text "Bottom Solder" at 214.382,121.844 h1.52
  text "Solder Resist" at 237.998,121.844 h1.52
  text "0.77mil" at 259.836,121.844 h1.52
  text "3.5" at 276.342,121.844 h1.52
  text "A. THE LAYER STACK HAS BEEN TAKEN FROM THE PCBPOWER," at 119.736,119.71 h1.52
  text "Bottom Overlay" at 214.382,118.796 h1.52
  text "FOLLOW IT FOR IMPEDANCE CONTROL" at 124.079,116.459 h1.52

## Dimensions
63.805,116.789 to 61.925,107.442 on Mechanical 1
65.837,125.933 to 63.805,116.789 on Mechanical 1
113.817,122.211 to 104.673,81.94 on Mechanical 1
71.647,52.369 to 81.001,50.825 on Mechanical 1
71.78,31.674 to 71.501,40.818 on Mechanical 1
32.856,75.362 to 23.698,35.219 on Mechanical 1
42.215,75.362 to 42.215,66.015 on Mechanical 1
32.842,66.015 to 42.215,66.015 on Mechanical 1